# Altium PCB TiltPCB_1.PcbDoc
Units mm, origin at the board's own origin, x right, y up, seen from the top; angles counter-clockwise.
Board outline 82.66 x 56.61 mm, 2 copper layers (Top Layer, Bottom Layer); 86 components, 74 nets, 316 pads, 105 vias.
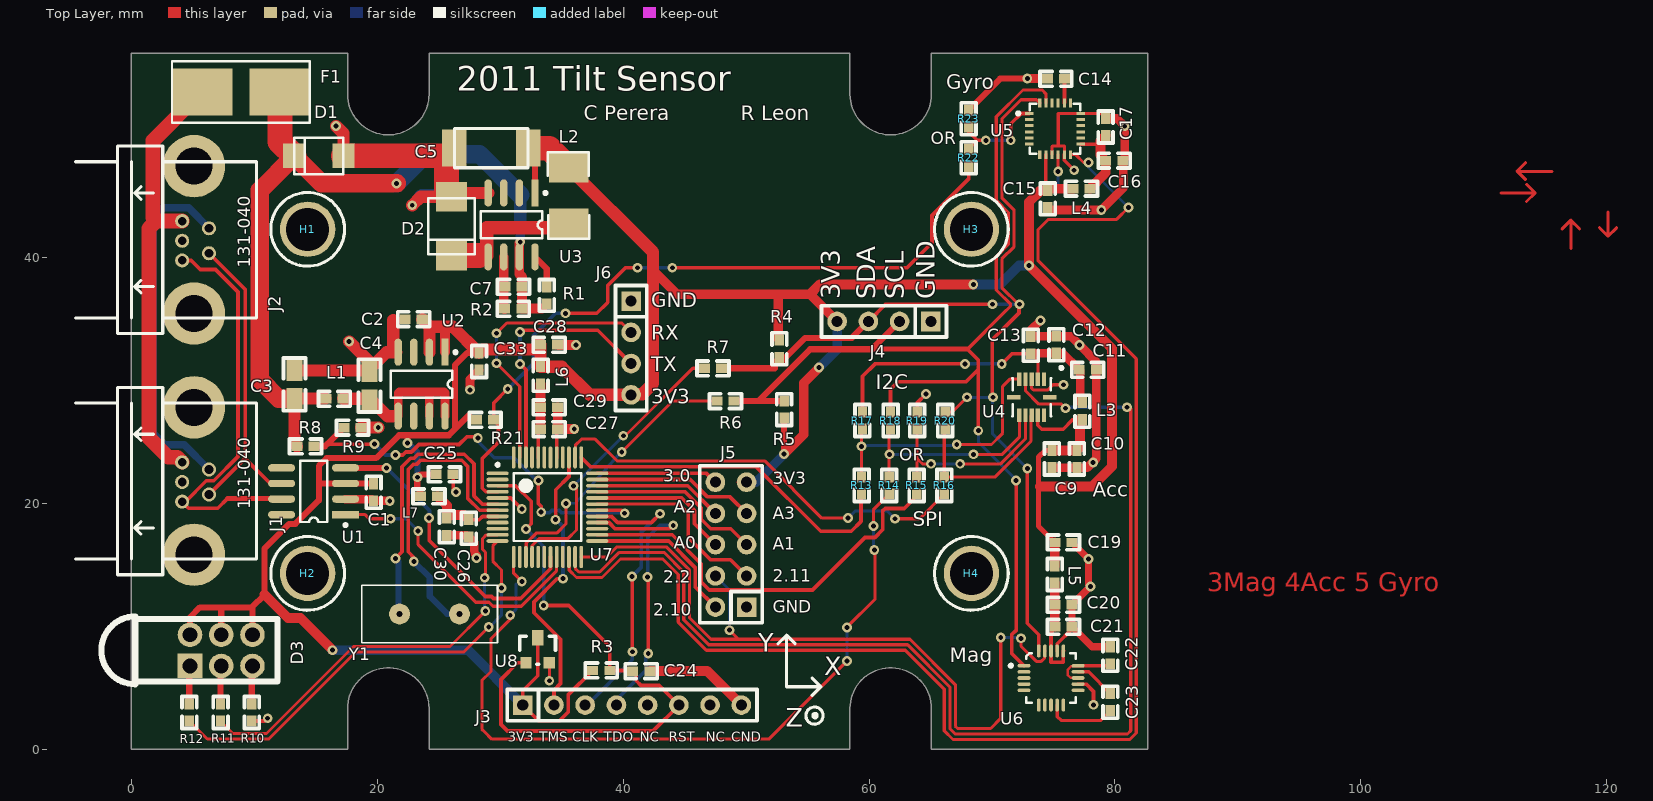
[diagram p0: Top Layer view]
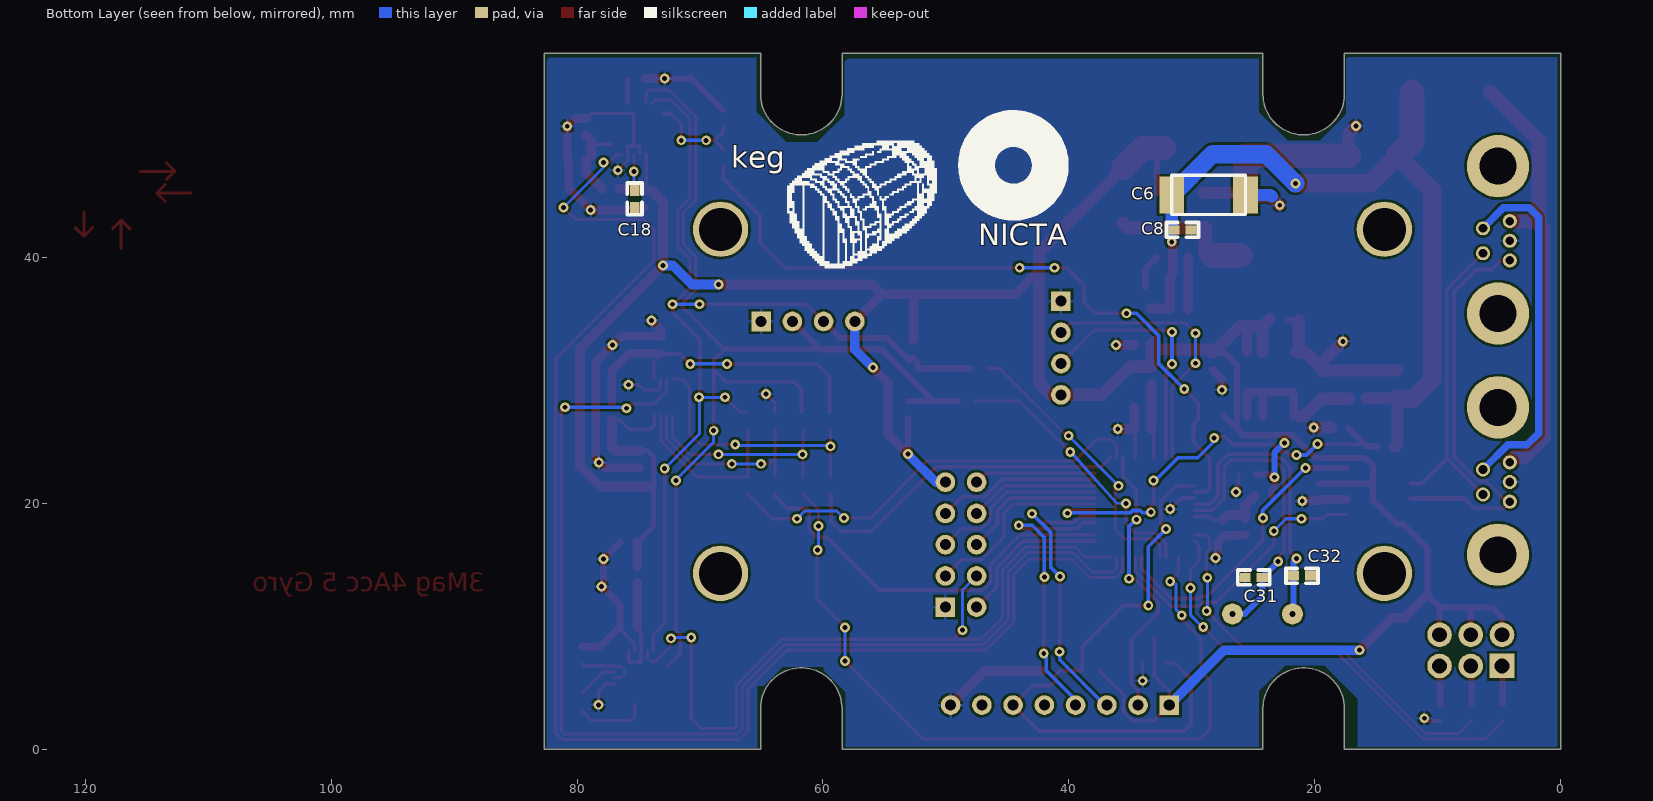
[diagram p1: Bottom Layer view, seen from below]

## Layer stack, top to bottom
Top Layer: signal copper 0.0356
Dielectric: dielectric 0.32, FR-4, Dk 4.8
Bottom Layer: signal copper 0.0356

## Board outline
17.575,0 17.575,3.31 cw(c20.89,3.31) 24.205,3.31 24.205,0 58.445,0 58.445,3.31 cw(c61.76,3.31) 65.075,3.31 65.075,0 65.08,-0.005 82.655,-0.005 82.655,56.605 82.65,56.6 65.075,56.6 65.075,53.29 cw(c61.76,53.29) 58.445,53.29 58.445,56.6 24.205,56.6 24.205,53.29 cw(c20.89,53.29) 17.575,53.29 17.575,56.605 -0.005,56.605 -0.005,-0.005 0,0

## Design rules (kind name [scope] priority, off if disabled: settings)
Clearance Clearance_1 [(HasFootprint('HMC5843 - LPCC 20 Pin') OR HasFootprint('ITG-3200 - QFN 24 Pin') OR HasFootprint('LGA - BMA180'))] p1: gap=0
Clearance [All] p2: gap=0.2
HoleSize [All] p1 off: absolutevalues=TRUE maxlimit=5 minlimit=0.3 maxpercent=80.000 minpercent=20.000
MinimumSolderMaskSliver MinimumSolderMaskSliver_1 [(HasFootprint('ITG-3200 - QFN 24 Pin'))] p1: minsoldermaskwidth=0
MinimumSolderMaskSliver [All] p2: minsoldermaskwidth=0.254
PolygonConnect [All] p1: connectstyle=Relief reliefconductorwidth=0.254 reliefentries=4 polygonreliefangle="90 Angle"
RoomDefinition AccGryro [InComponentClass('AccGryro')] p1: confinementstyle=ConfineIn formatcopy=TRUE lockcomponents=FALSE outline -78.232,-40.005 -27.432,-40.005 -27.432,-14.605 -78.232,-14.605
RoomDefinition U_3V-Switcher-50mA [InComponentClass('U_3V-Switcher-50mA')] p2: confinementstyle=ConfineIn formatcopy=TRUE lockcomponents=FALSE outline -78.232,-40.005 -27.432,-40.005 -27.432,-14.605 -78.232,-14.605
RoomDefinition TopLevel [InComponentClass('TopLevel')] p3: confinementstyle=ConfineIn formatcopy=TRUE lockcomponents=FALSE outline -78.232,-40.005 -27.432,-40.005 -27.432,-14.605 -78.232,-14.605
RoomDefinition PWR [InComponentClass('PWR')] p4: confinementstyle=ConfineIn formatcopy=TRUE lockcomponents=FALSE outline -78.232,-40.005 -27.432,-40.005 -27.432,-14.605 -78.232,-14.605
RoomDefinition LPC [InComponentClass('LPC')] p5: confinementstyle=ConfineIn formatcopy=TRUE lockcomponents=FALSE outline -78.232,-40.005 -27.432,-40.005 -27.432,-14.605 -78.232,-14.605
RoutingVias [All] p1: holewidth=0.4 width=0.8 viastyle="Through Hole" minholewidth=0.4 minwidth=0.8 maxholewidth=0.4 maxwidth=0.8
SilkToSilkClearance [All] p1: silktosilkclearance=0.1
SilkscreenOverComponentPads [All] p1 off: minsilkscreentomaskgap=0.1
SolderMaskExpansion [All] p1: expansion=0.102
TestPointUsage [All] p1: valid=0 allowmultiple=FALSE
Testpoint [All] p1: side=15 testpointundercomponent=TRUE minsize=1.016 maxsize=2.54 preferedsize=1.524 minholesize=0 maxholesize=1.016 preferedholesize=0.813 testpointgrid=0.025 style=1023 order=0-112345678
Width [All] p1: maxlimit=10 minlimit=0.2 preferedwidth=0.254 minimp=50.000000 maximp=50.000000 favimp=50.000000
20 further rules are at their usual default settings.

## Classes and differential pairs
component class U_3V-Switcher-50mA: C5 C6 C7 C8 D2 L2 R1 R2 U3
component class TopLevel: D3 H1 H2 H3 H4 J4 J5 J6 R4 R5 R6 R7 R8 R9 R10 R11 R12 R21
component class PWR: C1 C2 C3 C4 D1 F1 J1 J2 L1 U1 U2
component class LPC: C24 C25 C26 C27 C28 C29 C30 C31 C32 C33 J3 L6 L7 R3 U7 U8 Y1
component class AccGryro: C9 C10 C11 C12 C13 C14 C15 C16 C17 C18 C19 C20 C21 C22 C23 L3 L4 L5 R13 R14 R15 R16 R17 R18 R19 R20 R22 R23 U4 U5 U6

## Components (designator, comment, footprint, x,y, rotation, side; value= is the part's Value field where it differs from the comment)
C1 "100nF" 0603 19.685,20.193 r90 top
C2 "2.2u" 0603 22.25,34.976 r0 top
C3 "10u" 0805 13.259,28.524 r90 top
C4 "10u" 0805 19.355,28.423 r90 top
C5 "4u7 35V" MCCT-CASEC 32.258,48.895 r180 top
C6 "4u7 35V" MCCT-CASEC 31.623,45.085 r180 bottom
C7 "1n" 0603 31.775,37.617 r180 top
C8 "100nF" 0603 31.445,42.24 r180 bottom
C9 "10u" 0603 74.879,24.308 r270 top
C10 "0.1u" 0603 76.911,24.308 r270 top
C11 "1u" 0603 77.089,30.861 r0 top
C12 "100nF" 0603 75.235,32.207 r90 top
C13 "CAP" 0603 73.152,32.156 r90 top
C14 "2.2n 50V" 0603 75.895,54.534 r180 top
C15 "0.1u" 0603 74.549,45.466 r270 top
C16 "100nF" 0603 79.248,47.879 r0 top
C17 "10nF" 0603 79.248,49.911 r90 top
C18 "100n" 0603 75.311,45.466 r270 bottom
C19 "0.1u" 0603 75.108,16.815 r0 top
C20 "100nF" 0603 75.108,11.735 r0 top
C21 "10nF" 0603 75.108,9.957 r0 top
C22 "4.7u" 0603 79.629,6.934 r90 top
C23 "0.22u" 0603 79.629,4.521 r270 top
C24 "10nF" 0603 40.767,6.35 r0 top
C25 "1u" 0603 26.162,22.352 r180 top
C26 "10n" 0603 27.432,17.272 r90 top
C27 "10n" 0603 33.274,26.035 r0 top
C28 "1u" 0603 33.274,32.893 r0 top
C29 "100nF" 0603 33.274,27.813 r0 top
C30 "100nF" 0603 25.654,17.399 r90 top
C31 "18pF" 0603 24.257,13.97 r0 bottom
C32 "18pF" 0603 21.717,14.097 r180 bottom
C33 "100nF" 0603 28.27,32.233 r270 top
D1 "12V Transient Suppressor" SMA 15.24,48.26 r180 top
D2 "MBRS130" SMB 26.035,42.545 r270 top
D3 "1882-2781" LED_TRILEVEL 4.755,6.77 r90 top
F1 "125mA/3A" LITTELFUSE-154 8.89,53.467 r0 top
H1 "HOLE" M2.5 14.326,42.291 r0 top
H2 "HOLE" M2.5 14.326,14.3 r0 top
H3 "HOLE" M2.5 68.326,42.291 r0 top
H4 "HOLE" M2.5 68.326,14.3 r0 top
J1 "CON5-S" TRIAD5F 6.3,22.75 r90 top
J2 "CON5-S" TRIAD5F 6.3,42.375 r90 top
J3 "LPC SWD Connector" IDC8 31.826,3.581 r0 top
J4 "Generic_Header_4P" IDC4 65.024,34.798 r180 top
J5 "CON10" IDC10 50.038,11.557 r90 top
J6 "UART_Header" IDC4 40.64,36.449 r270 top
L1 "Ferrite" 0603 15.799,28.499 r0 top
L2 "330uH" 1812 35.56,42.799 r90 top
L3 "Ferrite" 0603 77.343,26.797 r90 top
L4 "Ferrite" 0603 76.581,45.593 r0 top
L5 "Ferrite" 0603 75.108,14.91 r270 top
L6 "Ferrite" 0603 33.274,29.718 r90 top
L7 "Ferrite" 0603 23.495,20.574 r0 top
R1 "100k" 0603 33.782,37.617 r270 top
R2 "1R2" 0603 31.75,35.814 r180 top
R3 "10k" 0603 38.913,6.401 r180 top
R4 "4K7" 0603 52.705,31.877 r90 top
R5 "4K7" 0603 53.086,28.321 r270 top
R6 "0R" 0603 47.625,28.321 r0 top
R7 "0R" 0603 46.609,30.988 r0 top
R8 "100K" 0603 14.859,24.638 r180 top
R9 "20K" 0603 18.669,26.162 r180 top
R10 "1K" 0603 9.779,3.683 r270 top
R11 "1K" 0603 7.239,3.683 r270 top
R12 "1K" 0603 4.699,3.683 r270 top
R13 "0R" 0603 59.385,22.149 r270 top
R14 "0R" 0603 61.629,22.149 r270 top
R15 "0R" 0603 63.873,22.149 r270 top
R16 "0R" 0603 66.116,22.149 r270 top
R17 "0R" 0603 59.461,27.432 r270 top
R18 "0R" 0603 61.747,27.432 r270 top
R19 "0R" 0603 63.906,27.432 r270 top
R20 "0R" 0603 66.192,27.432 r270 top
R21 "10K" 0603 29.464,26.797 r180 top
R22 "0R" 0603 68.097,48.819 r270 top
R23 "0R" 0603 68.097,51.994 r270 top
U1 "SN65HVD232" SO8 14.808,20.98 r90 top
U2 "MIC5200" SO8 23.597,29.693 r180 top
U3 "LTC1474" SO8 30.912,42.647 r180 top
U4 "BMA180" "LGA - BMA180" 73.228,28.626 r180 top
U5 "ITG-3200 Gyro" "ITG-3200 - QFN 24 Pin" 75.133,50.47 r0 top
U6 "HMC5843" "HMC5843 - LPCC 20 Pin" 74.803,5.791 r0 top
U7 "LPC11C14" TSQFP50P900X900-48N 33.833,19.685 r0 top
U8 "XC61CN2002MR" SOT23(3) 32.08,7.036 r0 top
Y1 "12 MHz" HC49/4H 18.72,10.998 r0 top

## Footprints (in the part's own frame and the unit in brackets; to place one, negate y for a bottom-side part, rotate by r counter-clockwise, add the part's x,y. Pads: shape width x height; smd on the part's side, far side on the other; paste and mask are expansions set on the pad)
0603 [mil]
  rect 35.43x30 smd: 1(0,0) 2(55,0)
  silkscreen extent -24,-24 79,24
0805 [mm]
  rect 1.7x1.27 smd: 1(0,0) 2(2.286,0)
  silkscreen extent -1,-0.9 3.3,0.9
1812 [mm]
  rect 2.4x3.2 smd: 1(0,0) 2(4.5,0)
  silkscreen extent -1.27,-1.66 5.77,1.7
HC49/4H [mm]
  round 1.7 hole 0.5: 1(3.085,0) 2(7.965,0)
  silkscreen extent 0,-2.35 11.05,2.35
"HMC5843 - LPCC 20 Pin" [mm] "HMC5843 - LPCC 20 Pin"
  oval 1.05x0.3 smd: 1(-2.2,1) 2(-2.2,0.5) 3(-2.2,0) 4(-2.2,-0.5) 5(-2.2,-1) 11(2.2,-1) 12(2.2,-0.5) 13(2.2,0) 14(2.2,0.5) 15(2.2,1)
  oval 0.3x1.05 smd: 6(-1,-2.2) 7(-0.5,-2.2) 8(0,-2.2) 9(0.5,-2.2) 10(1,-2.2) 16(1,2.2) 17(0.5,2.2) 18(0,2.2) 19(-0.5,2.2) 20(-1,2.2)
  silkscreen extent -3.4,-2 2,2, body extent -2,-2 2,2, height 1.46
IDC4 [mm]
  rect 1.6x1.6 hole 0.9: 1(0,0)
  round 1.6 hole 0.9: 2(2.54,0) 3(5.08,0) 4(7.62,0)
  silkscreen extent -1.27,-1.27 8.89,1.27
IDC8 [mm]
  rect 1.6x1.6 hole 0.9: 1(0,0)
  round 1.6 hole 0.9: 2(2.54,0) 3(5.08,0) 4(7.62,0) 5(10.16,0) 6(12.7,0) 7(15.24,0) 8(17.78,0)
  silkscreen extent -1.27,-1.27 19.05,1.27
IDC10 [mm]
  rect 1.6x1.6 hole 0.9: 1(0,0)
  round 1.6 hole 0.9: 2(0,2.54) 3(2.54,0) 4(2.54,2.54) 5(5.08,0) 6(5.08,2.54) 7(7.62,0) 8(7.62,2.54) 9(10.16,0) 10(10.16,2.54)
  silkscreen extent -1.27,-1.27 11.5,3.81
"ITG-3200 - QFN 24 Pin" [mm] "QFN, 24-Leads, Body 4.1x4.1mm (max), Pitch 0.50mm, IPC Low Density"
  rect 0.7x0.25 smd: 1(-2.1,1.25) 2(-2.1,0.75) 3(-2.1,0.25) 4(-2.1,-0.25) 5(-2.1,-0.75) 6(-2.1,-1.25) 13(2.1,-1.25) 14(2.1,-0.75) 15(2.1,-0.25) 16(2.1,0.25) 17(2.1,0.75) 18(2.1,1.25)
  rect 0.25x0.7 smd: 7(-1.25,-2.1) 8(-0.75,-2.1) 9(-0.25,-2.1) 10(0.25,-2.1) 11(0.75,-2.1) 12(1.25,-2.1) 19(1.25,2.1) 20(0.75,2.1) 21(0.25,2.1) 22(-0.25,2.1) 23(-0.75,2.1) 24(-1.25,2.1)
  silkscreen extent -3.12,-2.05 2.05,2.05, body extent -2.05,-2.05 2.05,2.05, height 0.95
LED_TRILEVEL [mm]
  rect 2x2 hole 1.2: 1(0,0)
  round 2 hole 1.2: 2(0,-2.54) 3(0,-5.08) 4(2.54,-5.08) 5(2.54,-2.54) 6(2.54,0)
  silkscreen extent -1.49,-7.11 4.03,7.21
"LGA - BMA180" [mm] "LCC, 12-Pins, Body 3.1x3.1mm (max), Pitch 0.50mm, IPC High Density"
  rect 0.35x1.1 smd: 1(-1,-1.475) 2(-0.5,-1.475) 3(0,-1.475) 4(0.5,-1.475) 5(1,-1.475) 7(1,1.475) 8(0.5,1.475) 9(0,1.475) 10(-0.5,1.475) 11(-1,1.475)
  rect 1.1x0.35 smd: 6(1.475,0) 12(-1.475,0)
  silkscreen extent -2.54,-2.51 1.57,1.56, body extent -1.51,-1.5 1.5,1.51, height 1
LITTELFUSE-154 [mm]
  rect 5x3.81 smd: 1(-3.185,0) 2(3.185,0)
  silkscreen extent -5.6,-2.51 5.6,2.5
M2.5 [mm]
  round 4.5 hole 3.5: 1(0,0)
  silkscreen extent -3,-3 3,3
MCCT-CASEC [mm]
  rect 2x3 smd: 1(0,0) 2(6,0)
  silkscreen extent 0,-1.6 6,1.6
SMA [mm]
  rect 1.8x2 smd: A(-2,0) K(2,0)
  silkscreen extent -2,-1.48 2,1.48
SMB [mm]
  rect 2.4x2.5 smd: A(-2.385,0) K(2.385,0)
  silkscreen extent -2.28,-1.9 2.3,1.9
SO8 [mm]
  rect 0.6x2.2 smd: 1(-1.905,-2.6)
  oval 0.6x2.2 smd: 2(-0.635,-2.6) 3(0.635,-2.6) 4(1.905,-2.6) 5(1.905,2.6) 6(0.635,2.6) 7(-0.635,2.6) 8(-1.905,2.6)
  silkscreen extent -2.88,-2.72 2.5,1.1
SOT23(3) [mil]
  rect 36x36 smd: 1(0,0) 2(75,0)
  rect 36x50 smd: 3(38,80)
  silkscreen extent -20,-5 95,85
TRIAD5F [mil]
  round 200 hole 118.11: 0(-273,48) 0(199,48)
  round 45 hole 27.56: 1(0,0) 2(23,86) 3(-40,86) 4(-103,86) 5(-80,0)
  silkscreen extent -337,-152 263,428
TSQFP50P900X900-48N [mm] "Thin QFP, 48-Leads, Body 7x7mm, Pitch 0.5mm, IPC Medium Density"
  oval 1.8x0.3 smd: 1(-4.05,2.75) 2(-4.05,2.25) 3(-4.05,1.75) 4(-4.05,1.25) 5(-4.05,0.75) 6(-4.05,0.25) 7(-4.05,-0.25) 8(-4.05,-0.75) 9(-4.05,-1.25) 10(-4.05,-1.75) 11(-4.05,-2.25) 12(-4.05,-2.75) 25(4.05,-2.75) 26(4.05,-2.25) 27(4.05,-1.75) 28(4.05,-1.25) 29(4.05,-0.75) 30(4.05,-0.25) 31(4.05,0.25) 32(4.05,0.75) 33(4.05,1.25) 34(4.05,1.75) 35(4.05,2.25) 36(4.05,2.75)
  oval 0.3x1.8 smd: 13(-2.75,-4.05) 14(-2.25,-4.05) 15(-1.75,-4.05) 16(-1.25,-4.05) 17(-0.75,-4.05) 18(-0.25,-4.05) 19(0.25,-4.05) 20(0.75,-4.05) 21(1.25,-4.05) 22(1.75,-4.05) 23(2.25,-4.05) 24(2.75,-4.05) 37(2.75,4.05) 38(2.25,4.05) 39(1.75,4.05) 40(1.25,4.05) 41(0.75,4.05) 42(0.25,4.05) 43(-0.25,4.05) 44(-0.75,4.05) 45(-1.25,4.05) 46(-1.75,4.05) 47(-2.25,4.05) 48(-2.75,4.05)
  silkscreen extent -4.17,-2.75 2.75,3.57, body extent -3.5,-3.5 3.5,3.5, height 1.6

## Part data
C1 C2 C3 C4 C7 C8 C9 C10 C11 C12 C14 C15 C16 C17 C18 C19 C20 C21 C22 C23 C24 C25 C26 C27 C28 C29 C30 C31 C32 C33: library part CAP, "Capacitor"
C5 C6: library part "Cap Pol3", "Polarized Capacitor (Surface Mount)"
C13: "Capacitor"
D1: library part DIODE, "Diode"
D2: library part "D SCHOTTKY", "Schottky Diode"
D3: library part LED-TRILEVEL, "Three level LED"
F1: library part FUSE2, "Fuse"
H1 H2 H3 H4: "Hole"
J1 J2: "Connector, 2 pin, with shield @ S"
J3: library part LPCLink_Connector
J5: "10 pin, right angle, ribbon con with claws"
L1 L3 L4 L5 L6 L7: library part INDUCTOR, "Inductor"
L2: library part Inductor, "Inductor"
R1 R2 R3 R4 R5 R6 R7 R8 R9 R10 R11 R12 R13 R14 R15 R16 R17 R18 R19 R20 R21 R22 R23: library part RES1, "Resistor"
U1: "3.3V CAN Transciever"
U2: "MIC5200 - SO8"
U3: "Step-down converter"
U5: library part ITG-3200
U7: library part LPC11C14_Full
U8: library part XC61F, "SOT23 reset generator"
Y1: library part CRYSTAL, "Crystal"

## Free pads (board coordinates)
  round 3 on Bottom Overlay mask+0.2: 2(38.76,47.041)

## Via types
v1: diameter 0.8, hole 0.4, Top Layer to Bottom Layer, 105 vias

## Nets (pads, with @x,y where several pads share a name; then routed paths per layer and width w, separated by ;. In a path a pad name is that pad's centre, name@x,y a point inside that pad or via, vN(x,y) a via of type N, cw(c..) or ccw(c..) an arc to the next point about the centre after c; other vN are vias at no path point)
3V3: C1.2 C2.2 C5.1 C9.1 C10.1 C15.1 C19.1 C25.2 C28.1 C33.1 D3.4 D3.5 D3.6 J3.1 J4.4 J5.9 J6.4 L2.2 L3.1 L4.1 L5.1 L6.2 L7.1 R3.2 R4.2 R5.2 R21.2 U1.3 U2.1 U2.2 U3.1 U4.10 U5.8 U8.3 | length 271.3
  Top Layer w0.253: J5.9@49.352,21.717 J5.9
  Top Layer w0.3: U8.3@33.02,9.042 U8.3 33.045,5.969 31.826,4.75 J3.1 33.096,2.311 34.823,2.311 35.516,3.004 35.516,4.401 R3.2 ; 73.728,26.431 73.728,26.348 ; U4.10 73.728,26.348 ; U5.8 74.383,45.632 C15.1 ; L3.1 76.556,26.797 75.794,26.035 74.041,26.035 73.728,26.348
  Top Layer w0.4: C9.1 74.32,24.308 73.778,23.766 73.778,18.144 C19.1
  Top Layer w0.5: D3.6 4.755,10.724 5.563,11.532 9.779,11.532 10.823,12.576 10.823,16.335 12.814,18.325 13.319,18.325 15.24,20.247 15.24,23.038 15.875,23.673 19.888,23.673 21.758,25.543 22.454,25.543 ; D3.5 7.295,11.511 ; D3.4 9.835,11.486 ; 15.291,21.615 U1.3 C1.2@19.66,21.615 ; v1(22.454,24.917) 22.454,25.543 ; L7.1 23.495,21.006 23.241,21.26 23.241,22.098 v1(23.266,22.123) 23.495,22.352 C25.2 ; 27.448,27.178 26.302,26.032 ; C33.1 27.305,32.233 26.302,31.229 26.302,26.032 ; C5.1 32.817,48.336 U3.1 ; v1(53.086,24.003) R5.2 ; 22.454,25.543 25.812,25.543 26.302,26.032
  Top Layer w0.75: 42.418,38.964 44.374,37.008 52.603,37.008 ; R4.2 52.603,33.376 52.603,37.008 ; v1(53.086,24.003) 54.686,25.603 54.686,29.794 v1(55.931,31.039) ; J4.4 55.194,37.008 52.603,37.008
  Top Layer w0.8: 10.823,12.576 12.731,10.668 13.741,10.668 v1(16.358,8.052) ; 25.476,34.366 25.502,34.341 U2.1 ; J6.4@40.589,28.88 J6.4 ; 55.194,37.008 55.982,37.795 v1(68.478,37.795) ; 73.889,21.361 78.13,21.361 79.756,22.987 79.756,32.588 v1(73,39.345) 73,44.501 73.965,45.466 C15.1 74.676,45.593 L4.1 ; C9.1 C10.1 77.165,24.562 L3.1@77.165,26.797 ; L5.1 C19.1
  Top Layer w1: C2.2 24.232,34.392 ; U2.2 24.232,34.392 ; C28.1@33.045,33.122 C28.1 ; L2.2 42.418,40.441 42.418,38.964 42.418,29.743 41.554,28.88 40.589,28.88 40.538,28.829 37.287,28.829 35.001,31.115 L6.2 C28.1 ; 24.232,34.392 24.257,34.366 25.476,34.366 26.137,34.366 C33.1 28.55,32.512 32.893,32.512 C28.1
  Top Layer w2: C5.1 33.964,48.895 L2.2
  Bottom Layer w0.5: v1(22.454,24.917) 23.266,24.105 v1(23.266,22.123)
  Bottom Layer w0.75: J5.9 50.8,21.717 v1(53.086,24.003) ; v1(55.931,31.039) 57.404,32.512 J4.4
  Bottom Layer w0.8: v1(16.358,8.052) 27.356,8.052 J3.1 ; v1(68.478,37.795) 70.637,37.795 72.187,39.345 v1(73,39.345)
12V_MEASURE: R8.1 R9.2 U7.30 | length 35
  Top Layer w0.3: 15.748,24.638 15.926,24.816 v1(19.761,24.816) ; v1(21.463,23.927) 22.061,23.927 22.301,24.167 22.764,24.167 23.387,24.79 26.645,24.79 27.28,25.425 28.067,25.425 v1(28.169,25.324) ; v1(33.096,21.869) 33.096,19.964 33.325,19.736 v1(33.325,19.279) ; U7.30 39.874,19.435 v1(40.119,19.19) v1@40.183,19.126
  Top Layer w0.5: R8.1 15.748,24.638 ; 15.926,24.816 R9.2
  Bottom Layer w0.3: v1(19.761,24.816) 20.65,23.927 v1(21.463,23.927) ; v1(28.169,25.324) 28.169,25.044 29.515,23.698 31.115,23.698 32.944,21.869 v1(33.096,21.869) ; v1@33.325,19.419 33.504,19.24 34.003,19.24 34.183,19.419 34.804,19.419 34.983,19.24 40.069,19.24 v1(40.119,19.19)
/RESET: C24.1 J3.6 R3.1 U7.3 U8.1 | length 50.1
  Top Layer w0.3: U7.3 31.239,21.435 32.512,20.162 32.512,18.339 v1(32.08,17.907) ; U8.1 31.42,7.036 30.048,5.664 30.048,2.007 30.582,1.473 42.418,1.473 J3.6 42.926,5.182 41.453,5.182 41.059,5.575 41.059,6.058 C24.1 40.716,6.401 R3.1 38.913,8.331 35.56,11.684 v1(33.528,11.684)
  Bottom Layer w0.3: v1(32.08,17.907) 33.528,16.459 v1(33.528,11.684)
ACC_P5: R13.1 R17.2 U4.5 | length 21.1
  Top Layer w0.25: R13.1 R17.2@59.385,25.959 ; v1(67.132,24.79) 69.952,24.79 70.866,25.705 70.866,29.515 71.452,30.101 U4.5
  Bottom Layer w0.25: v1(59.385,24.638) 59.461,24.714 67.056,24.714 v1(67.132,24.79)
ACC_P7: R14.1 R18.2 U4.7 | length 16.7
  Top Layer w0.25: R14.1 R18.2@61.629,25.916 ; v1(68.504,23.986) 70.833,23.986 72.228,25.381 U4.7
  Bottom Layer w0.25: v1(61.662,23.986) v1(68.504,23.986)
ACC_P8: R15.1 R19.2 U4.8 | length 15.6
  Top Layer w0.25: R15.1@63.906,22.183 R19.2 ; 63.906,23.647 64.338,23.216 v1(65.024,23.216) ; v1(67.412,23.216) 70.699,23.216 72.728,25.245 U4.8
  Bottom Layer w0.25: v1(65.024,23.216) v1(67.412,23.216)
ACC_P9: R16.1 R20.2 U4.9 | length 14.2
  Top Layer w0.25: R20.2@66.116,25.959 R16.1 70.268,22.149 73.178,25.059 73.178,27.101 U4.9
ACCPWR: C11.1 C12.1 C13.1 L3.2 R17.1 U4.2 | length 26.9
  Top Layer w0.25: C13.1 73.728,31.58 U4.2
  Top Layer w0.3: R17.1 59.461,30.328 60.477,31.344 v1(67.793,31.344) ; v1(70.79,31.344) 71.603,32.156 C13.1
  Top Layer w0.7: C13.1 73.203,32.207 C12.1 75.743,32.207 C11.1 77.165,30.785 L3.2@77.165,28.194
  Bottom Layer w0.3: v1(67.793,31.344) v1(70.79,31.344)
CAN+5V: J1.1 J2.1 | length 28.8
  Bottom Layer w0.6: J1.1 4.285,24.765 2.718,24.765 1.778,25.705 1.778,43.282 2.527,44.031 4.644,44.031 J2.1
CAN+12V: C3.1 C6.1 C7.1 C8.1 D1.K F1.2 L1.1 R1.2 R2.1 R8.2 U3.7 | length 67.7
  Top Layer w0.8: v1(31.623,41.275) 31.547,41.199 U3.7 31.547,38.659 31.775,38.43 C7.1 31.775,37.465 31.775,36.678 31.775,35.839 R1.2@33.401,35.839
  Top Layer w1: R8.2 13.259,24.841 C3.1 L1.1@15.773,28.524
  Top Layer w1.5: C3.1 11.963,28.524 10.439,30.048 10.439,45.459 D1.K 15.475,46.025 v1(21.565,46.025)
  Top Layer w2: F1.2 12.075,49.425 D1.K
  Bottom Layer w0.8: v1(31.623,41.275) C8.1@31.623,42.418
  Bottom Layer w1: C8.1@31.623,42.418 C6.1
  Bottom Layer w1.5: v1(21.565,46.025) 23.952,48.412 28.296,48.412 C6.1
CAN_H: J1.4 J2.4 U1.7 | length 33.7
  Top Layer w0.3: J2.4@4.564,39.759 4.85,39.759 5.594,39.014 6.833,39.014 8.661,37.186 8.661,23.808 6.682,21.829 6.078,21.829 4.383,20.134 J1.4 4.641,19.609 7.01,19.609 7.798,20.396
  Top Layer w0.4: J2.4 J2.4@4.564,39.759 ; 7.798,20.396 U1.7@12.208,20.396
CAN_L: J1.5 J2.5 U1.6 | length 25.9
  Top Layer w0.3: J1.5 9.237,23.655 ; J2.5 9.237,37.406 9.237,23.655 ; U1.6 11.277,21.615 9.237,23.655
CANGND: C1.1 C2.1 C3.2 C4.2 C5.2 C6.2 C8.2 C9.2 C10.2 C11.2 C12.2 C13.2 C14.2 C15.2 C16.2 C17.2 C18.2 C19.2 C20.2 C21.2 C22.2 C24.2 C25.1 C26.1 C27.2 C28.2 C29.2 C30.1 C31.2 C32.2 C33.2 D1.A D2.A J1.3 J2.3 J3.8 J4.1 J5.1 J6.1 R9.1 R10.2 R19.1 R23.1 U1.2 U2.4 U3.4 U4.3 U5.9 U5.11 U5.18 U6.12 U6.17 U7.5 U7.41 U8.2 | length 145.6
  Top Layer w0.25: v1(33.985,5.563) U8.2 ; U4.3 73.228,29.362 73.365,29.226 74.538,29.226 74.955,29.643 v1(75.821,29.643) ; U5.9 74.883,49.043 74.913,49.073 75.387,49.073 ; U5.11 75.895,48.382 75.895,49.073 75.387,49.073 ; C17.2 78.836,51.72 U5.18 75.387,51.72 75.387,49.073
  Top Layer w0.3: R10.2 10.846,2.286 v1(11.074,2.515) ; C25.1 26.162,21.158 v1(26.391,20.93) ; U7.5 30.848,20.435 v1(31.75,19.533) ; U7.41 34.583,25.947 C27.2 ; R19.1 63.906,28.169 v1(64.643,28.905) ; U6.17 75.303,8.573 76.505,9.775 C21.2 ; U5.11 75.883,47.9 v1@76.733,47.05 ; U6.12 77.665,5.291 78.257,4.699 v1(78.257,3.607)
  Top Layer w0.5: 21.301,34.916 C2.1@22.19,34.916 ; R23.1 70.663,54.559 v1(72.873,54.559)
  Top Layer w0.6: C19.2 v1(77.851,15.469) 77.851,13.386 v1(78.003,13.233) C20.2 C21.2 78.13,8.331 C22.2
  Top Layer w0.7: U1.2 C1.1@19.533,20.345 ; C1.1 v1(21.006,20.193) ; 21.301,32.293 U2.4 ; C30.1 27.305,17.399 C26.1 27.883,16.821 27.883,15.968 28.067,15.784 v1(28.067,15.545) ; v1(27.534,29.235) 27.534,30.099 C33.2 ; v1(72.873,54.559) 74.473,54.559 C14.2 ; v1(73.939,34.874) 73.152,34.087 C13.2 73.203,33.604 C12.2 76.403,33.604 v1(77.114,32.893) 78.486,31.521 C11.2 78.486,23.622 77.749,22.885 C9.2@74.905,22.885 ; C15.2 74.752,43.866 v1(78.892,43.866) 80.67,45.644 80.67,47.854 C16.2 80.797,48.031 v1(80.797,50.673) 80.162,51.308 C17.2
  Top Layer w0.8: C29.2 C27.2 v1(36.017,26.035) ; C28.2 v1(36.17,32.893) ; C24.2 46.838,6.35 J3.8
  Top Layer w1: C3.2 19.253,30.81 20.736,32.293 21.301,32.293 21.301,34.916 ; v1(16.637,50.698) 17.24,50.095 D1.A ; v1(17.704,33.172) 19.355,31.521 C4.2 ; R9.1 v1(20.066,26.162) ; v1(22.835,44.247) 23.518,44.93 D2.A ; D2.A@25.728,45.237 28.998,45.237 U3.4
  Top Layer w2: D1.A 25.623,48.26 25.623,45.342 D2.A@25.728,45.237
  Bottom Layer w1: 23.495,44.983 23.597,45.085 C6.2
  other v1: 78.232,23.317 76.685,47.098
CHIPSEL: R13.2 U7.37 | length 27.8
  Top Layer w0.3: U7.37 37.337,22.981 50.806,22.981 56.058,17.729 58.547,17.729 59.347,18.529 59.347,20.714 R13.2
GYROPWR: C16.1 C17.1 L4.2 U5.13 | length 7.2
  Top Layer w0.3: U5.13 78.684,49.22
  Top Layer w0.8: L4.2 79.248,46.863 C16.1 ; C16.1@78.892,48.235 C16.1 ; C17.1 78.816,49.479 78.816,48.311 C16.1
I2C_SCL: J4.2 R5.1 R6.2 R18.1 U5.23 U6.1 | length 91.1
  Top Layer w0.25: 70.878,35.413 71.513,36.047 71.513,36.193 70.347,37.359 70.347,40.07 71.349,41.072 71.349,43.663 70.347,44.664 70.347,51.451 72.516,53.619 74.092,53.619 74.383,53.328 U5.23 ; v1(71.958,21.869) v1@71.984,21.844
  Top Layer w0.3: R18.1 61.747,29.286 62.357,29.896 67.894,29.896 68.885,30.886 ; v1(68.885,25.908) 68.885,30.886 ; 70.878,35.413 68.003,32.537 68.885,31.656 68.885,30.886 ; v1@71.984,21.844 71.984,9.697 71.615,9.328 71.615,7.78 U6.1
  Top Layer w0.4: 60.223,32.537 68.003,32.537
  Top Layer w0.5: R6.2 50.978,28.321 ; R5.1 50.978,28.321 ; J4.2 60.223,32.537 55.194,32.537 50.978,28.321
  Bottom Layer w0.25: v1(68.885,25.908) 68.885,24.994 71.958,21.92 v1(71.958,21.869)
I2C_SDA: J4.3 R4.1 R7.2 R20.1 U5.24 U6.20 | length 81.9
  Top Layer w0.25: R20.1 66.777,27.432 v1(67.97,28.626) ; v1@72.192,36.15 70.797,37.545 70.797,39.884 71.799,40.885 71.799,43.849 70.797,44.851 70.797,51.264 72.365,52.832 73.621,52.832 U5.24
  Top Layer w0.3: J4.3 61.341,36.195 v1(70.053,36.195) ; v1(70.079,28.626) 70.028,28.677 70.028,33.325 72.192,35.489 v1@72.192,36.15 ; v1(72.873,22.835) 72.873,10.236 73.803,9.306 U6.20
  Top Layer w0.5: R7.2 52.324,30.988 52.324,31.496 R4.1 ; R4.1@52.959,31.623 54.788,33.452 58.598,33.452 J4.3
  Bottom Layer w0.25: v1(67.97,28.626) v1(70.079,28.626) 70.028,28.575 70.028,25.679 v1(72.873,22.835)
  Bottom Layer w0.3: v1(70.053,36.195) v1(72.238,36.195)
MAGINT: J5.4 U6.19 U7.24 | length 63.1
  Top Layer w0.25: U7.24 38.673,15.635 39.497,16.459 43.499,16.459 45.373,14.585 45.373,10.71 47.139,8.945 49.374,8.945 ; v1(48.641,9.677) 49.374,8.945 ; v1(70.714,9.093) 70.714,2.515 69.886,1.687 67.197,1.687 67.016,1.869 67.016,5.25 63.321,8.945 49.374,8.945 ; v1(72.365,9.017) 72.365,8.383 73.606,7.141 74,7.141 74.278,7.419 74.278,7.966 U6.19
  Bottom Layer w0.25: J5.4 48.641,12.954 v1(48.641,9.677) ; v1(70.714,9.093) 72.288,9.093 v1(72.365,9.017)
MAGPWR: C20.1 C21.1 L5.2 U6.16 U6.18 | length 8.6
  Top Layer w0.25: U6.16@75.778,7.966 U6.16
  Top Layer w0.3: C21.1@75.108,9.767 74.803,9.463 U6.18 74.803,7.061 75.794,7.061 75.803,7.071 U6.16 U6.16@75.819,8.007
  Top Layer w0.4: C21.1@75.108,9.767 C21.1
  Top Layer w0.8: C21.1 C20.1 L5.2
MISO1: R15.2 U7.26 | length 32.9
  Top Layer w0.3: U7.26 43.978,17.435 46.348,15.065 46.348,13.596 46.997,12.947 55.39,12.947 59.665,17.221 60.471,17.221 61.1,17.85 61.1,19.368 61.316,19.583 62.865,19.583 63.873,20.591 R15.2
MOSI1: R16.2 U7.38 | length 35.2
  Top Layer w0.25: U7.38 36.108,23.76 36.108,24.729 36.601,25.222 37.719,25.222 39.485,23.456 51.5,23.456 56.159,18.796 v1(58.293,18.796) ; v1(62.103,18.745) 64.11,18.745 R16.2
  Bottom Layer w0.25: v1(58.293,18.796) 58.877,19.38 61.468,19.38 v1(62.103,18.745)
NetC4_1: C4.1 L1.2 U2.5 U2.7 U2.8 | length 14.7
  Top Layer w0.5: 21.234,27.076 U2.5@21.675,27.076
  Top Layer w0.7: U2.5 21.692,28.981 21.768,29.058 24.155,29.058 ; U2.7 24.232,28.981 24.155,29.058 ; U2.8 25.502,28.981 25.425,29.058 24.155,29.058
  Top Layer w1: L1.2 19.279,28.499 C4.1 19.502,28.423 20.849,27.076 21.234,27.076
NetC7_2: C7.2 R2.2 U3.6 | length 4.3
  Top Layer w0.8: U3.6 30.277,35.89 R2.2
NetC14_1: C14.1 U5.20 | length 2
  Top Layer w0.3: U5.20 75.895,52.582 75.895,53.264 ; C14.1 75.895,53.264 ; 75.901,53.27 75.895,53.264
NetC18_1: C18.1 U5.10 | length 2.9
  Top Layer w0.25: v1(75.383,46.994) U5.10
  Bottom Layer w0.25: C18.1 75.383,45.538 v1(75.383,46.994)
NetC22_1: C22.1 U6.13 U6.15 | length 5
  Top Layer w0.2: U6.13 76.403,5.791 76.178,6.016 76.178,6.478 76.442,6.741 76.953,6.741 U6.15
  Top Layer w0.27: U6.15 79.486,6.791 C22.1
NetC23_1: C23.1 U6.14 | length 3.4
  Top Layer w0.27: U6.14 77.859,6.291 C23.1
NetC23_2: C23.2 U6.9 | length 5.7
  Top Layer w0.27: U6.9 75.303,2.65 75.616,2.337 78.842,2.337 C23.2
NetC26_2: C26.2 C30.2 L7.2 U7.8 | length 6.3
  Top Layer w0.254: U7.8@29.771,18.923 U7.8
  Top Layer w0.3: C26.2 28.294,18.669 28.56,18.935 U7.8 ; C26.2@27.432,18.923 C26.2@27.444,18.935
  Top Layer w0.8: L7.2 25.654,19.812 C30.2 ; C30.2@25.908,19.05 27.051,19.05 C26.2
NetC27_1: C27.1 C29.1 L6.1 U7.44 | length 6.1
  Top Layer w0.3: U7.44 33.083,25.844 C27.1
  Top Layer w0.8: C27.1 C29.1 L6.1
NetD2_K: D2.K L2.1 U3.5 | length 11.9
  Top Layer w1: 28.293,40.16 U3.5@28.893,40.16
  Top Layer w1.1: U3.5@28.893,40.16 28.893,42.43 35.191,42.43 L2.1
  Top Layer w2: D2.K 28.293,40.16
NetD3_1: D3.1 R12.1 | length 3
  Top Layer w0.5: R12.1 D3.1@4.699,6.714
NetD3_2: D3.2 R11.1 | length 3.1
  Top Layer w0.5: R11.1 7.239,6.714 D3.2
NetD3_3: D3.3 R10.1 | length 3.1
  Top Layer w0.5: R10.1 9.779,6.714 D3.3
NetF1_1: F1.1 J1.2 J2.2 | length 35.8
  Top Layer w1.2: J1.2 3.701,23.749 2.997,23.749 1.422,25.324 1.422,42.367 2.014,42.959 ; J2.2 2.014,42.959 ; F1.1 1.753,49.515 1.753,48.825 1.741,48.813 1.741,43.233 2.014,42.959
NetJ5_2: J5.2 U7.25 | length 12.8
  Top Layer w0.3: U7.25 43.695,16.935 45.848,14.782 45.848,13.207 J5.2
NetJ5_3: J5.3 U7.31 | length 15.7
  Top Layer w0.25: U7.31 44.556,19.935 45.296,19.194
  Top Layer w0.3: 45.296,19.194 45.296,17.212 47.091,15.418 48.717,15.418 J5.3
NetJ5_5: J5.5 U7.33 | length 14.5
  Top Layer w0.3: U7.33 45.033,20.935 46.348,19.62 46.348,18.701 47.116,17.932 48.743,17.932 J5.5
NetJ5_6: J5.6 U7.32 | length 11.9
  Top Layer w0.21: J5.6 J5.6@47.498,16.764
  Top Layer w0.3: U7.32 44.767,20.435 45.796,19.406 45.796,18.339 J5.6
NetJ5_7: J5.7 U7.35 | length 13.3
  Top Layer w0.3: U7.35 45.451,21.935 46.863,20.523 48.692,20.523 J5.7
NetJ5_8: J5.8 U7.34 | length 10.6
  Top Layer w0.3: U7.34 45.24,21.435 J5.8
NetJ5_10: J5.10 U7.36 | length 9.9
  Top Layer w0.3: U7.36 46.78,22.435 J5.10
NetJ6_2: J6.2 U7.47 | length 22.5
  Top Layer w0.254: v1(29.693,31.394) 31.583,29.504 U7.47 ; v1(29.693,33.833) 30.531,34.671 39.878,34.671 J6.2
  Bottom Layer w0.254: v1(29.693,31.394) v1(29.693,33.833)
NetJ6_3: J6.3 U7.46 | length 20.6
  Top Layer w0.3: v1(31.598,31.344) 32.083,30.858 U7.46 ; v1(31.598,33.934) 31.75,34.087 37.922,34.087 J6.3
  Bottom Layer w0.3: v1(31.598,31.344) v1(31.598,33.934)
NetR1_1: R1.1 U3.8 | length 2.8
  Top Layer w0.5: U3.8 33.782,39.081 R1.1
NetR6_1: R6.1 U7.15 | length 22.5
  Top Layer w0.25: U7.15 32.108,15.66 32.108,16.766 32.911,17.57 34.588,17.57 35.331,18.313 v1(35.331,19.99) ; v1(39.878,24.181) 44.018,28.321 R6.1
  Bottom Layer w0.25: v1(35.331,19.99) 36.118,20.031 39.649,23.952 v1(39.878,24.181)
NetR7_1: R7.1 U7.16 | length 23.4
  Top Layer w0.25: U7.16 32.583,16.557 33.146,17.12 35.484,17.12 36.195,17.831 36.195,21.184 v1(35.954,21.425) ; v1(40.005,25.495) 40.005,25.479 40.006,25.478 40.15,25.478 45.66,30.988 R7.1
  Bottom Layer w0.25: v1(35.954,21.425) v1@40.014,25.485
NetR21_1: R21.1 R22.2 U7.4 | length 59.7
  Top Layer w0.3: U7.4 28.826,20.935 28.533,21.228 28.533,23.656 29.845,24.968 29.845,26.416 R21.1 29.464,28.169 v1(30.607,29.312) ; v1(35.306,35.458) 37.846,35.458 38.735,36.347 38.735,37.719 40.183,39.167 v1(41.148,39.167) ; v1(43.993,39.167) 63.094,39.167 65.126,41.199 65.126,43.409 68.097,46.38 R22.2
  Bottom Layer w0.3: v1(30.607,29.312) 30.626,29.312 32.69,31.375 32.69,33.655 34.493,35.458 v1(35.306,35.458) ; v1(41.148,39.167) v1(43.993,39.167)
NetR22_1: R22.1 R23.2 U5.1 | length 8.3
  Top Layer w0.3: R22.1 68.809,49.53 ; R23.2 68.097,50.241 68.809,49.53 ; v1(69.494,49.53) 68.809,49.53 ; v1(71.526,49.53) 71.526,50.876 72.37,51.72 U5.1
  Bottom Layer w0.3: v1(69.494,49.53) v1(71.526,49.53)
NetU1_1: U1.1 U7.20 | length 23.2
  Top Layer w0.25: U1.1 18.999,19.075 19.329,18.745 v1(21.057,18.745) ; v1(23.317,17.755) 23.317,16.637 28.002,11.952 29.079,11.952 29.403,11.627 31.704,11.627 34.558,14.481 34.558,15.61 U7.20
  Bottom Layer w0.25: v1(21.057,18.745) 22.327,18.745 v1(23.317,17.755)
NetU1_4: U1.4 U7.19 | length 24.2
  Top Layer w0.3: v1(24.206,18.796) 24.206,16.993 28.772,12.427 29.275,12.427 29.447,12.255 31.66,12.255 34.083,14.678 U7.19
  Top Layer w0.5: U1.4 v1(20.752,22.885)
  Bottom Layer w0.3: v1@20.777,22.86 24.232,19.406 v1@24.232,19.152
  Bottom Layer w0.5: v1@20.676,22.885 v1(20.752,22.885) 20.803,22.885 v1@20.777,22.86
NetU4_4: U4.4 U7.23 | length 93.8
  Top Layer w0.25: U7.23 36.108,15.61 36.108,14.688 36.386,14.41 38.084,14.41 39.683,16.009 43.312,16.009 44.923,14.399 44.923,10.524 46.952,8.495 63.135,8.495 66.566,5.063 66.566,1.682 67.011,1.237 81.017,1.237 81.287,1.507 81.287,27.7 81.174,27.813 v1(80.975,27.813) ; U4.4 72.728,29.151 73.812,28.067 75.641,28.067 v1(75.971,27.737)
  Bottom Layer w0.25: v1(75.971,27.737) 75.971,27.762 76.022,27.813 v1(80.975,27.813)
NetU5_12: U5.12 U7.22 | length 117.8
  Top Layer w0.25: U7.22 35.608,15.61 35.608,14.552 36.2,13.96 38.271,13.96 39.779,15.469 43.217,15.469 44.473,14.212 44.473,10.337 46.766,8.045 62.948,8.045 66.116,4.877 66.116,1.496 66.825,0.787 81.204,0.787 81.737,1.321 81.737,31.75 73.725,39.763 73.725,42.229 74.6,43.104 80.137,43.104 v1(81.102,44.069) ; U5.12 76.801,48.37 77.445,47.727 v1(77.851,47.727)
  Bottom Layer w0.25: v1(77.851,47.727) 77.851,47.32 v1(81.102,44.069)
NetU7_1: U7.1
NetU7_2: U7.2
NetU7_9: U7.9
NetU7_10: U7.10
NetU7_14: U7.14
NetU7_17: U7.17
NetU7_18: U7.18
NetU7_21: U7.21
NetU7_40: U7.40
NetU7_42: U7.42
NetU7_43: U7.43
NetU7_45: U7.45
NetU7_48: U7.48
REDLED: R12.2 U7.12 | length 36.7
  Top Layer w0.25: R12.2 6.165,0.82 11.159,0.82 18.246,7.907 27.033,7.907 v1(29.058,9.931) ; U7.12 29.388,16.54 29.388,15.291 30.099,14.58 v1(30.099,13.106)
  Bottom Layer w0.25: v1(29.058,9.931) 29.134,9.931 30.085,10.883 30.085,13.093 v1(30.099,13.106)
SCK1: R14.2 U7.13 | length 63.7
  Top Layer w0.25: v1(30.81,10.897) 30.81,10.566 29.235,8.992 29.235,6.325 28.499,5.588 28.499,1.626 28.727,1.397 29.312,0.813 51.841,0.813 v1(58.191,7.163) ; U7.13@31.083,14.878 U7.13 31.083,14.307 v1(31.75,13.64) ; v1(58.191,9.906) 60.477,12.192 v1@60.477,16.205 ; v1(60.35,18.161) 60.35,19.473 R14.2
  Bottom Layer w0.25: v1(30.81,10.897) 31.267,11.354 31.267,13.437 ; v1(58.191,7.163) v1(58.191,9.906) ; v1(60.35,18.161) 60.35,16.281 v1(60.427,16.205)
TCLK: J3.3 U7.29 | length 23.9
  Top Layer w0.3: U7.29 39.047,18.935 39.542,18.44 42.29,18.44 v1(43.002,19.152) ; v1(40.716,14.046) 40.742,14.021 v1(40.742,7.925)
  Bottom Layer w0.3: J3.3 37.059,3.581 40.742,7.264 v1(40.742,7.925) ; v1(40.716,14.046) 41.453,14.783 41.453,17.628 v1@43.002,19.177
TDO: J3.4 U7.28 | length 24
  Top Layer w0.3: U7.28 38.84,18.435 39.335,17.94 43.776,17.94 44.048,18.212 v1(44.069,18.212) ; v1(41.986,13.995) 42.037,13.945 v1(42.037,7.772)
  Bottom Layer w0.3: J3.4 39.446,4.013 41.834,6.401 41.834,7.569 v1(42.037,7.772) ; v1@41.783,14.199 v1(41.986,13.995) 41.986,17.221 42.977,18.212 v1(44.069,18.212)
TMS: J3.2 U7.39 | length 23.3
  Top Layer w0.3: J3.2 34.366,4.801 34.9,5.334 34.9,8.941 32.733,11.107 32.733,11.981 34.62,13.868 v1(35.103,13.868) ; v1(34.493,18.669) 34.519,18.694 34.519,21.107 35.583,22.172 U7.39
  Bottom Layer w0.3: v1(34.493,18.669) 34.519,18.694 35.103,18.11 v1(35.103,13.868)
XTALIN: C32.1 U7.6 Y1.1 | length 24.4
  Top Layer w0.2: U7.6@28.962,19.935 U7.6
  Top Layer w0.3: v1(21.463,15.519) 22.002,16.058 22.002,22.967 22.702,23.667 22.971,23.667 23.299,23.995 27.071,23.995 27.856,23.21 27.856,20.603 28.524,19.935 U7.6
  Bottom Layer w0.5: v1(21.463,15.519) 21.717,15.265 C32.1 Y1.1@21.717,11.086
XTALOUT: C31.1 U7.7 Y1.2 | length 25.8
  Top Layer w0.2: U7.7@28.896,19.435 U7.7
  Top Layer w0.3: v1(22.962,15.265) 22.962,15.596 22.502,16.055 22.502,22.76 22.909,23.167 23.178,23.167 23.506,23.495 26.864,23.495 27.356,23.003 27.356,20.396 28.317,19.435 U7.7
  Bottom Layer w0.5: v1(22.962,15.265) C31.1 24.257,12.421 25.679,10.998 Y1.2
YELLED: R11.2 U7.11 | length 33.4
  Top Layer w0.25: R11.2 8.255,1.27 10.973,1.27 18.059,8.357 25.908,8.357 v1(28.778,11.227) ; v1(28.727,13.945) 28.792,14.009 28.792,16.014 28.558,16.248 28.558,17.132 28.861,17.435 U7.11
  Bottom Layer w0.25: v1@28.727,11.278 v1(28.727,13.945)
pads on no net: H1.1 H2.1 H3.1 H4.1 J1.0 J2.0 J3.5 J3.7 U1.5 U1.8 U2.3 U2.6 U3.2 U3.3 U4.1 U4.6 U4.11 U4.12 U5.2 U5.3 U5.4 U5.5 U5.6 U5.7 U5.14 U5.15 U5.16 U5.17 U5.19 U5.21 U5.22 U6.2 U6.3 U6.4 U6.5 U6.6 U6.7 U6.8 U6.10 U6.11 U7.27
copper on no net: | length 17.7
  Top Layer w0.254: 111.404,45.237 114.186,45.25 ; 112.712,47.028 113.411,47.727 ; 113.411,46.33 112.769,46.972 112.781,47.003 115.557,47.003 ; 113.487,44.552 114.186,45.25 ; 113.487,45.949 114.186,45.25 ; 116.395,42.329 117.094,43.028 ; 117.094,40.716 117.094,43.028 ; 117.792,42.329 117.094,43.028 ; 119.418,42.431 120.117,41.732 ; 120.117,43.702 120.117,41.732 ; 120.815,42.431 120.117,41.732

## Polygon pours and split planes (outlines as drawn)
no net on Top Layer "TopShield" (solid, remove dead copper, pour order 1000): 25.552,151.562 42.723,151.562 42.774,151.511 42.774,147.98 42.774,146.964 44.806,144.932 44.831,144.907 46.761,144.907 47.65,144.907 49.428,146.685 49.759,147.015 49.759,151.536 83.591,151.536 83.617,151.511 83.668,151.46 83.668,147.98 83.668,146.939 85.268,145.339 85.725,144.882 88.24,144.882 88.544,144.882 90.145,146.482 90.653,146.99 90.653,151.536 107.823,151.536 107.874,151.486 107.874,95.301 90.653,95.301 90.627,95.326 90.627,98.831 90.627,99.797 88.697,101.727 88.519,101.905 85.573,101.905 85.573,101.829 83.668,99.924 83.668,95.301 49.708,95.301 49.784,95.377 49.784,99.009 49.784,99.797 47.854,101.727 47.676,101.905 45.187,101.905 44.856,101.905 42.774,99.822 42.799,99.797 42.799,95.301 25.527,95.301 25.552,95.326 25.552,151.562
CANGND on Bottom Layer "GNDPLANE" (solid, pour order 1001): 0.254,56.286 17.272,56.286 17.323,56.236 17.424,56.134 17.424,51.664 17.424,51.638 19.253,49.809 19.583,49.479 22.149,49.479 22.2,49.479 24.486,51.765 24.536,51.816 24.536,56.185 57.988,56.185 58.242,55.931 58.242,51.968 58.242,51.587 60.3,49.53 60.452,49.378 62.967,49.378 65.354,51.765 65.405,51.816 65.405,56.236 82.271,56.236 82.474,56.032 82.474,0.127 65.303,0.127 65.354,0.178 65.354,5.156 64.821,5.156 63.271,6.706 59.944,6.706 59.944,6.401 58.242,4.699 58.141,4.597 58.141,0.178 24.435,0.178 24.536,0.279 24.536,3.759 24.536,4.699 22.479,6.756 22.428,6.807 19.355,6.807 19.202,6.807 16.459,4.064 16.51,4.013 16.51,0.178 0.356,0.178 0.203,0.33 0.254,0.381 0.254,56.286

## Other copper
Top Layer:
  text "1LPC 2SWITCH" at 27.356,61.392 h1.52
  text "3Mag 4Acc 5 Gyro" at 87.503,12.827 h1.52

## Silkscreen, mask and mechanical layers (free items; w line width, h text height)
Top Overlay:
  circle w0.3: c55.603,2.729 r0.15
  circle w0.254: c55.561,2.729 r0.7
  lines w0.254: 52.591,8.572 53.289,9.271 ; 53.988,8.572 53.289,9.271 ; 55.372,4.381 56.07,5.08 ; 55.372,5.779 56.07,5.08 ; 53.289,9.271 53.289,5.08 56.07,5.08
  text "Gyro" at 66.294,53.67 h1.2
  text "2011 Tilt Sensor" at 26.441,53.569 h2
  text "C Perera" at 36.779,51.181 h1.2
  text "R Leon" at 49.555,51.181 h1.2
  text "OR" at 64.999,49.2 h1
  text "3V3" at 57.633,36.601 h1.52 r90
  text "SDA" at 60.503,36.601 h1.52 r90
  text "SCL" at 62.84,36.601 h1.52 r90
  text "GND" at 65.329,36.601 h1.52 r90
  text "GND" at 42.291,35.941 h1.2
  text "RX" at 42.291,33.299 h1.2
  text "TX" at 42.291,30.734 h1.2
  text "I2C" at 60.528,29.286 h1.2
  text "3V3" at 42.291,28.118 h1.2
  text "OR" at 62.459,23.47 h1
  text "3.0" at 43.256,21.768 h1
  text "3V3" at 52.172,21.565 h1
  text "Acc" at 78.181,20.523 h1.2
  text "A2" at 44.089,19.228 h1
  text "A3" at 52.172,18.72 h1
  text "SPI" at 63.551,18.136 h1.2
  text "A0" at 44.089,16.307 h1
  text "A1" at 52.172,16.205 h1
  text "2.11" at 52.172,13.614 h1
  text "2.2" at 43.256,13.538 h1
  text "GND" at 52.172,11.1 h1
  text "2.10" at 42.423,10.846 h1
  text "Y" at 50.978,7.925 h1.52
  text "Mag" at 66.548,7.061 h1.2
  text "X" at 56.363,5.994 h1.52
  text "Z" at 53.213,1.84 h1.52
  text "3V3" at 30.607,0.584 h0.8
  text "TMS" at 33.147,0.584 h0.8
  text "CLK" at 35.839,0.584 h0.8
  text "TDO" at 38.43,0.584 h0.8
  text "NC" at 41.351,0.584 h0.8
  text "RST" at 43.713,0.584 h0.8
  text "NC" at 46.711,0.584 h0.8
  text "CND" at 48.768,0.584 h0.8
Bottom Overlay:
  circle w3: c44.504,47.498 r3
  region: 137 vertices and 55 holes, not listed, extent 50.724,39.116 62.916,49.479
  text "keg" at 67.437,46.685 h3
  text "NICTA" at 47.346,40.386 h3
Mechanical 1:
  circle w0.254: c14.325,42.3 r1.602
  circle w0.254: c68.325,42.3 r1.602
  circle w0.254: c68.325,14.3 r1.602
  circle w0.254: c14.325,14.3 r1.602
  lines w0.254: -0.005,-0.005 -0.005,56.605 17.575,56.605 17.575,53.295 ; 0,0 17.575,0 17.575,3.31 cw(c20.89,3.31) 24.205,3.31 24.205,0 58.445,0 58.445,3.31 cw(c61.76,3.31) 65.075,3.31 65.075,0 ; 0.376,10.739 12.009,10.739 ; 0.554,5.329 11.933,5.329 ; 7.818,28.214 10.231,28.214 10.231,15.387 7.92,15.387 ; 7.818,47.849 10.231,47.849 10.231,35.022 7.92,35.022 ; 17.575,53.29 ccw(c20.89,53.29) 24.205,53.29 24.205,56.6 58.445,56.6 58.445,53.29 ccw(c61.76,53.29) 65.075,53.29 65.075,56.6 82.65,56.6 ; 65.08,-0.005 82.655,-0.005 82.655,56.605
  text "Hole = 3.5mm" at 12.167,63.754 h1
  text "Press q to toggle mil and mm" at -48.621,51.201 h1
  text "CAN_2 Placement" at -25.005,43.048 h1
  text "X 6.300mm" at -25.005,40.457 h1
  text "Y 42.375mm" at -25.005,37.79 h1
  text "CAN_1 Placement" at -25.005,23.338 h1
  text "X 6.300mm" at -25.005,20.747 h1
  text "Y 22.750mm" at -25.005,18.08 h1
  text "LED Placement" at -25.005,9.52 h1
  text "X 4.755mm" at -25.005,6.929 h1
  text "Y 6.770mm" at -25.005,4.262 h1

## Text inside footprints (layer, text, board x,y; h text height)
J1: Top Overlay "131-040" at 9.653,19.524 h1 r90
J2: Top Overlay "131-040" at 9.653,39.149 h1 r90